# Altium PCB USB-UART V0.1.PcbDoc
Units mm, origin at the board's own origin, x right, y up, seen from the top; angles counter-clockwise.
Board outline 75.95 x 49.4 mm, 2 copper layers (Top Layer, Bottom Layer), stack 1.58 mm thick; 41 components, 24 nets, 129 pads, 346 vias.
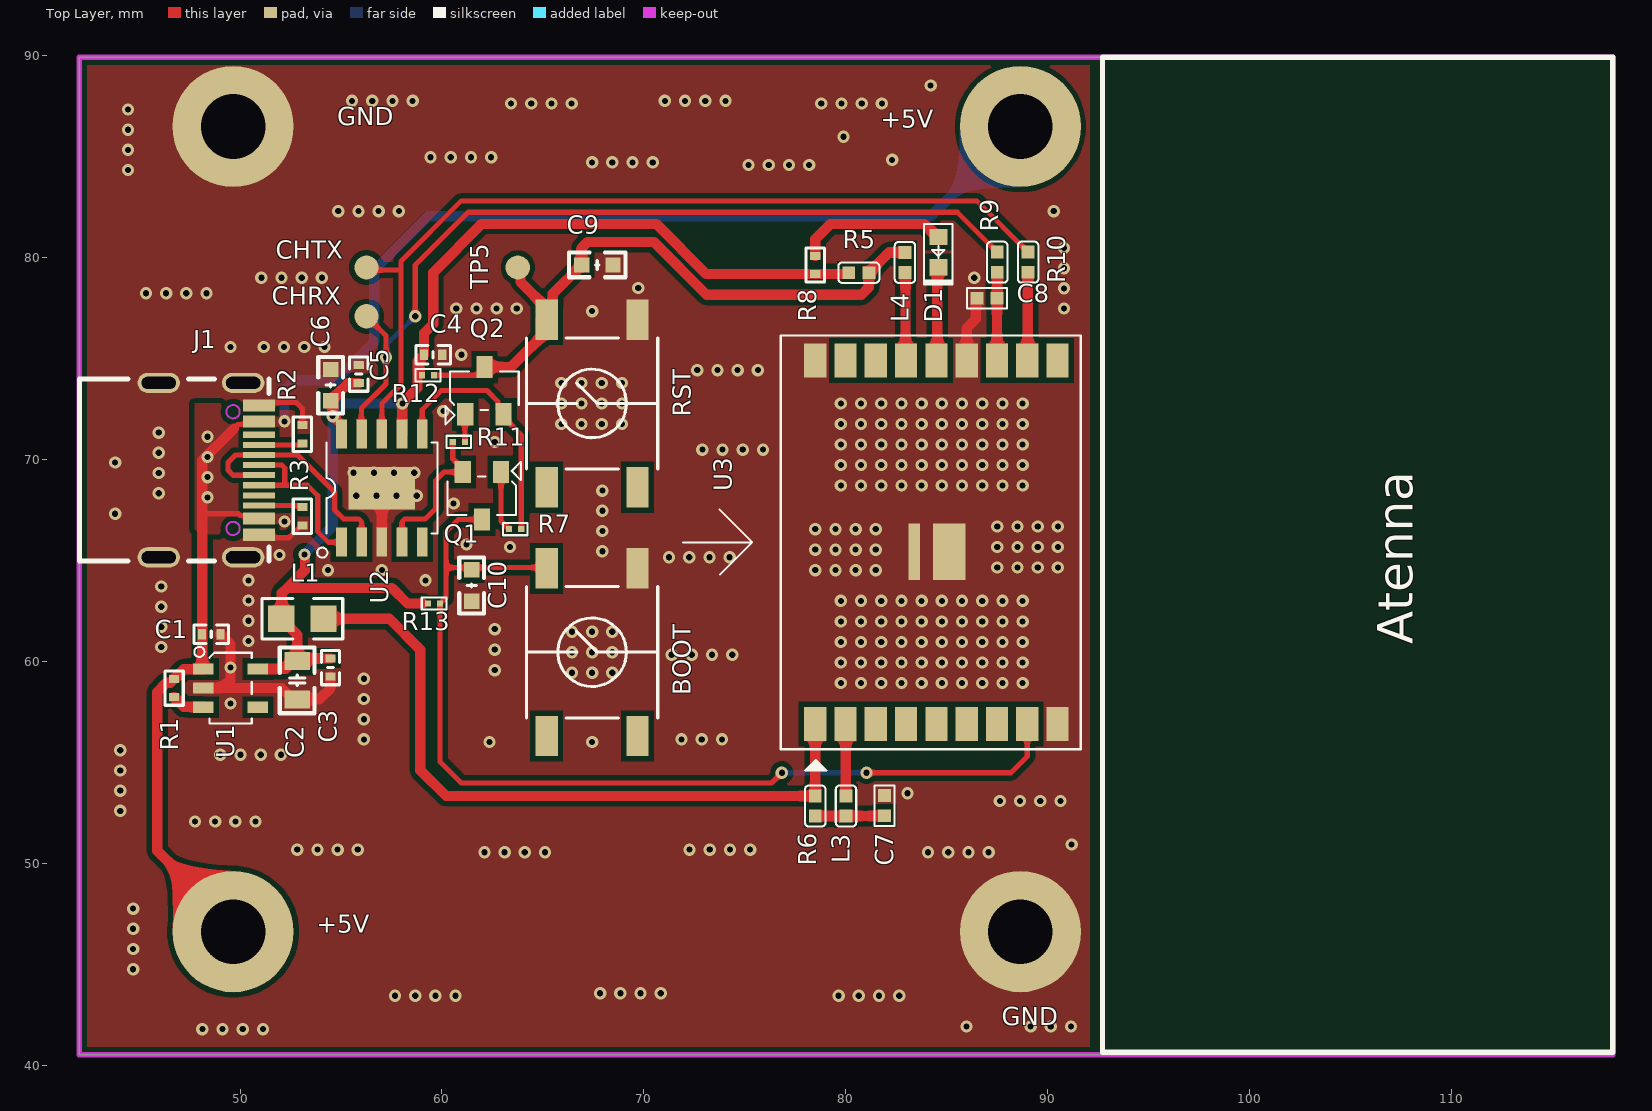
[diagram p0: Top Layer view]
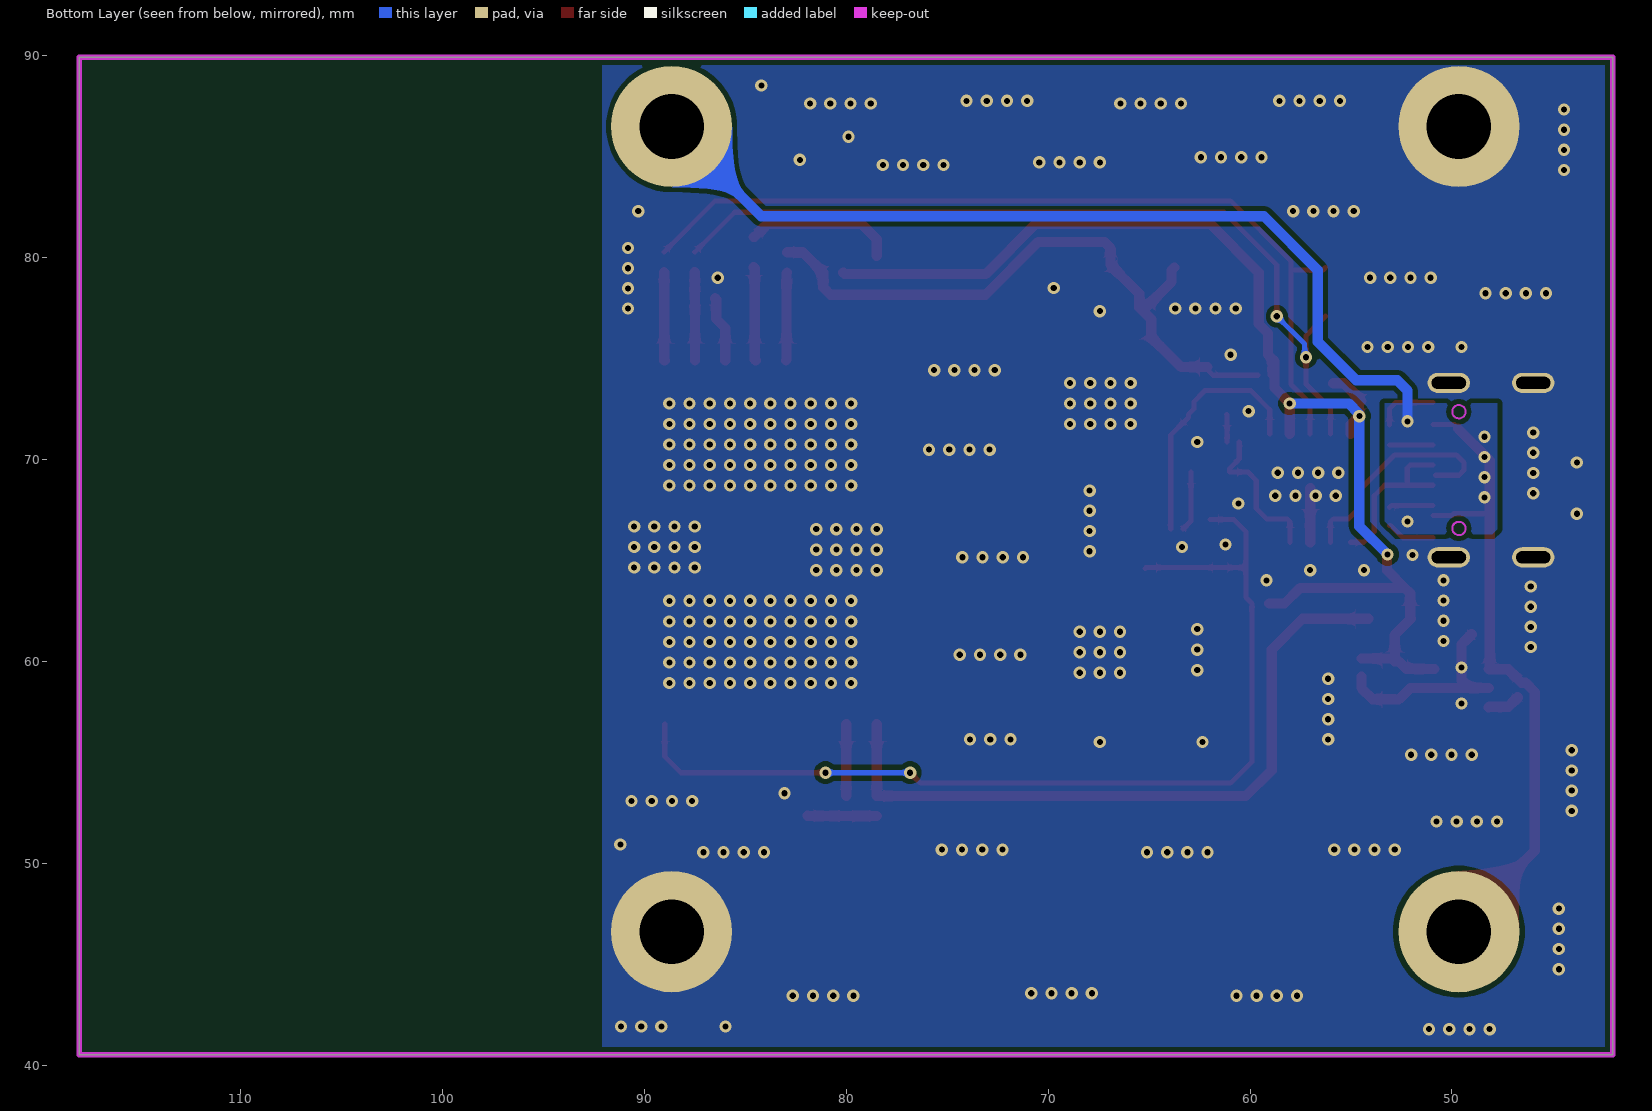
[diagram p1: Bottom Layer view, seen from below]

## Layer stack, top to bottom
Top Solder: solder mask 0.0102, Solder Resist, Dk 3.5
Top Layer: signal copper 0.0356
Dielectric 1: dielectric 1.5086, FR-4, Dk 4.8
Bottom Layer: signal copper 0.0356
Bottom Solder: solder mask 0.0102, Solder Resist, Dk 3.5

## Board outline
42.037,40.513 42.037,89.916 117.983,89.916 117.983,40.513

## Design rules (kind name [scope] priority, off if disabled: settings)
Clearance [All] p1: gap=0.254 ignorepadtopadclearanceinfootprint=FALSE except(0: Arc-Hole Track-Hole SMDPad-Hole THPad-Hole Via-Hole Fill-Hole Poly-Hole Region-Hole Text-Hole; 0.2: Arc-Arc Arc-Track Arc-SMDPad Track-Track Track-SMDPad SMDPad-SMDPad)
PolygonConnect [All] p1: connectstyle=Direct reliefconductorwidth=0.254 reliefentries=4 polygonreliefangle="90 Angle" airgapwidth=0.254
RoutingVias [All] p1: holewidth=0.711 width=1.27 viastyle="Through Hole" minholewidth=0.254 minwidth=0.254 maxholewidth=1.27 maxwidth=1.27
SolderMaskExpansion [All] p1: expansion=0.102 istentingtop=FALSE
Width [All] p1: maxlimit=0.762 minlimit=0.254 preferedwidth=0.254
30 further rules are at their usual default settings.

## Components (designator, comment, footprint, x,y, rotation, side; value= is the part's Value field where it differs from the comment)
+5V "TEST" "srew hole" 49.657,46.609 r0 top value=DNP (schematic designator TP2)
+5V "TEST" "srew hole" 88.646,86.487 r0 top value=DNP (schematic designator TP1)
BOOT "SWITCH" SW-SD-SH-66T04 67.437,60.452 r270 top locked value=SD-SH-66T04-7.0-B (schematic designator BOOT1)
C1 "CAP" "C 0402_L" 48.572,61.341 r180 top value=100nF/50V/X7R/0402
C2 "Cap" "C 0805_L" 52.832,59.055 r270 top value=1uF/10V/X7R/0805
C3 "CAP" "C 0402_L" 54.483,59.69 r270 top value=100nF/50V/X7R/0402
C4 "CAP" "C 0402_L" 59.563,75.184 r180 top value=100nF/50V/X7R/0402
C5 "CAP" "C 0402_L" 55.88,74.226 r270 top value=100nF/50V/X7R/0402
C6 "Cap" "C 0603_L" 54.483,73.675 r270 top value=1uF/50V/X5R/0603
C7 "CAP" CAP-CC0402 81.915,52.848 r270 top value=100nF/50V/X7R/0402
C8 "CAP" CAP-CC0402 86.995,77.978 r180 top value=22pF/50V/NP0/0402
C9 "Cap" "C 0603_L" 67.691,79.629 r180 top value=1uF/50V/X5R/0603
C10 "Cap" "C 0603_L" 61.468,63.754 r90 top value=1uF/50V/X5R/0603
CHRX "TEST" TP-60 56.261,77.089 r90 top value=DNP
CHTX "TEST" TP-60 56.261,79.502 r90 top value=DNP
D1 "LED" LED-0603 84.582,80.264 r270 top value="MS-PTV1608SGBC GREEN 25mA 5V 10uA 62mW -40-85℃"
GND "TEST" "srew hole" 49.657,86.487 r0 top value=DNP (schematic designator TP4)
GND "TEST" "srew hole" 88.646,46.609 r0 top value=DNP (schematic designator TP3)
J1 "USB TYPE-C" TYPE-C-W 50.939,69.471 r270 top locked
L1 "BEAD" FBM-LC0805 53.086,62.103 r0 top value=UPZ2012E121-4R0TF
L3 "RES" RES-RC0402 80.01,52.832 r90 top value=FBMA-6H-100505-500T01
L4 "RES" RES-RC0402 82.931,79.756 r90 top value=FBMA-6H-100505-500T01
Q1 "TRANS_NPN" TRI-SOT-23 61.976,68.199 r180 top value="S9013 H级"
Q2 "TRANS_NPN" TRI-SOT-23 62.103,73.406 r0 top value="S9013 H级"
R1 "RES" "R 0402_L" 46.736,58.674 r270 top value=5.1K/1%/0402
R2 "RES" "R 0402_L" 53.086,71.247 r90 top value=5.1K/1%/0402
R3 "RES" "R 0402_L" 53.086,67.183 r90 top value=5.1K/1%/0402
R5 "RES" RES-RC0402 80.645,79.248 r0 top value=10K/1%/0402
R6 "RES" RES-RC0402 78.486,52.832 r90 top value=10K/1%/0402
R7 "RES" "R 0201_M" 63.627,66.548 r180 top value=4.7K/1%/0201
R8 "RES" "R 0402_L" 78.486,79.629 r90 top value=510R/1%/0402
R9 "RES" RES-RC0402 87.503,79.766 r90 top value=33R/1%/0402
R10 "RES" RES-RC0402 89.027,79.766 r90 top value=33R/1%/0402
R11 "RES" "R 0201_M" 60.833,70.866 r0 top value=4.7K/1%/0201
R12 "RES" "R 0201_M" 59.309,74.168 r180 top value=4.7K/1%/0201
R13 "RES" "R 0201_M" 59.609,62.865 r180 top value=4.7K/1%/0201
RST "SWITCH" SW-SD-SH-66T04 67.437,72.771 r270 top locked value=SD-SH-66T04-7.0-B (schematic designator RST1)
TP5 "TEST" TP-60 63.754,79.502 r0 top value=DNP
U1 "IC_LDO" IC-SOT23-5L-UP8806MMA5-33 49.53,58.674 r270 top value=TPL740F33-5TR
U2 "CH340K" CH340E/K 57.023,68.58 r90 top value=CH340E
U3 "WIFI" WIFI-ESP8684-WROOM-02UC 90.486,56.896 r90 top value=ESP8684-WROOM-02UC

## Footprints (in the part's own frame and the unit in brackets; to place one, negate y for a bottom-side part, rotate by r counter-clockwise, add the part's x,y. Pads: shape width x height; smd on the part's side, far side on the other; paste and mask are expansions set on the pad)
"C 0402_L" [mm] "无极性贴片电容"
  rect 0.4x0.5 smd: 1(-0.45,0) 2(0.45,0)
  silkscreen extent -0.85,-0.45 0.85,0.45, body extent -0.5,-0.26 0.5,0.26, height 0.53
"C 0603_L" [mil] "无极性贴片电容"
  rect 30x30 smd: 1(-30.59,0) 2(30.59,0)
  silkscreen extent -55,-24 55,24, body extent -31,-16 31,16, height 32
"C 0805_L" [mil] "无极性贴片电容"
  rect 35x50 smd: 1(-37.4,0) 2(37.4,0)
  silkscreen extent -64,-34 64,34, body extent -39,-24 39,24, height 20
CAP-CC0402 [mm]
  rrect0% 0.635x0.635 smd: 1(-0.5,0) 2(0.5,0)
  silkscreen extent -1,-0.5 1,0.5, body extent -0.5,-0.25 0.5,0.25, height 0.5
CH340E/K [mm]
  rect 2.1x3.3 smd: 0(0,0)
  rect 1.435x0.53 smd: 1(-2.682,2) 2(-2.682,1) 3(-2.682,0.001) 4(-2.682,-1) 5(-2.682,-2) 6(2.682,-2) 7(2.682,-1) 8(2.682,0.001) 9(2.682,1) 10(2.682,2)
  silkscreen extent -3.45,-2.75 2.25,3.2
FBM-LC0805 [mm]
  rrect0% 1.3x1.3 smd: 1(-1.048,0) 2(1.048,0)
  silkscreen extent -2,-1 2,1
IC-SOT23-5L-UP8806MMA5-33 [mm]
  rect 0.55x1 smd: 1(-0.95,-1.35) 2(0,-1.35) 3(0.95,-1.35) 4(0.95,1.35) 5(-0.95,1.35)
  silkscreen extent -2.04,-1.8 1.75,1.05
LED-0603 [mil]
  rect 32x35 smd: 1(-29.53,0) 2(29.53,0)
  silkscreen extent -55,-28 63,28
"R 0201_M" [mm] "1/20W贴片电阻"
  rect 0.3x0.3 smd: 1(-0.3,0) 2(0.3,0)
  silkscreen extent -0.61,-0.3 0.61,0.3, body extent -0.3,-0.15 0.3,0.15, height 0.23
"R 0402_L" [mm] "1/16W贴片电阻"
  rect 0.4x0.5 smd: 1(-0.45,0) 2(0.45,0)
  silkscreen extent -0.85,-0.45 0.85,0.45, body extent -0.5,-0.25 0.5,0.25, height 0.3
RES-RC0402 [mm]
  rrect0% 0.635x0.635 smd: 1(-0.498,0) 2(0.498,0)
  silkscreen extent -1.02,-0.51 1.02,0.51, body extent -0.5,-0.23 0.5,0.25, height 0.5
"srew hole" [mm]
  round 6 hole 3.2: 1(0,0)
SW-SD-SH-66T04 [mm]
  rect 2x1.1 smd: 1(-4.15,2.25) 2(-4.15,-2.25) 3(4.15,2.25) 4(4.15,-2.25)
  silkscreen extent -3.25,-3.25 3.25,3.25
TP-60 [mm]
  round 1.2 smd: 1(0,0)
TRI-SOT-23 [mm]
  rect 0.8x1.1 smd: 1(-0.95,-1.175) 2(0.95,-1.175) 3(0,1.175)
  silkscreen extent -1.93,-1.68 1.7,0.95
TYPE-C-W [mm]
  oval 1x2.1 hole 0.6 slot 1.7 at 90 deg: 1(-4.32,-0.785) 2(-4.32,-4.965) 3(4.32,-0.785) 4(4.32,-4.965)
  rect 0.3x1.57 smd: A1(-3.35,0) A4(-2.55,0) A5(-1.25,0) A6(-0.25,0) A7(0.25,0) A8(1.25,0) A9(2.55,0) A12(3.35,0) B1(3.05,0) B4(2.25,0) B5(1.75,0) B6(0.75,0) B7(-0.75,0) B8(-1.75,0) B9(-2.25,0) B12(-3.05,0)
  Keep-Out Layer circle w0.1: c-2.89,-1.285 r0.33
  Keep-Out Layer circle w0.1: c2.89,-1.285 r0.33
  silkscreen extent -4.5,-8.9 4.5,0.5
WIFI-ESP8684-WROOM-02UC [mm]
  rect 1.7x1.1 smd: 1(0,12) 2(0,10.5) 3(0,9) 4(0,7.5) 5(0,6) 6(0,4.5) 7(0,3) 8(0,1.5) 9(0,0) 10(18,0) 11(18,1.5) 12(18,3) 13(18,4.5) 14(18,6) 15(18,7.5) 16(18,9) 17(18,10.5) 18(18,12)
  rect 2.8x0.55 smd: 19(8.53,7.095)
  rect 2.8x1.6 smd: 20(8.53,5.37)
  silkscreen extent -2.3,-1.15 19.24,18.55

## Part data
+5V +5V CHRX CHTX GND GND TP5 U1: library part Component_1
  +5V +5V CHRX CHTX GND GND TP5: Vendor=NA
  U1: ID=4A0-0500-2800, Vendor=3PEAK
BOOT RST: library part SW-PB, ID=4A6-0300-0400, Vendor=金成功/键富, 状态=已确认正确
D1: library part LED1, "Typical Green LED", ID=4A2-0300-0700, Vendor=MASON
L1: library part Inductor, ID=4A5-0200-1000, Vendor=Sunlord
L3 L4 R1 R2 R3 R5 R6 R7 R8 R9 R10 R11 R12 R13: library part Res2
  L3 L4: ID=4A5-0200-4000
  R1 R2 R3 R7 R11 R12 R13: ID=4A3-0104-5300, Vendor=YAGEO/WALSIN/SAMSUNG/FH/厚生/旺诠/MURATA
  R5 R6: ID=4A3-0104-0800, Vendor=YAGEO/WALSIN/SAMSUNG/FH/厚生/旺诠/MURATA
  R8: ID=4A3-0104-5500, Vendor=YAGEO/WALSIN/SAMSUNG/FH/厚生/旺诠/MURATA
  R9 R10: ID=4A3-0104-4500, Vendor=YAGEO/WALSIN/SAMSUNG/FH/厚生/旺诠/MURATA
Q1 Q2: library part NPN, "TRI NPN S9013 H级（200-350） 500mA 40V -55-150℃ SOT-23", ID=4A2-0800-0500, Vendor=长电
U3: "WIFI ESP-WROOM-02", Vendor=乐鑫
C1 C3 C4 C5 C7: ID=4A4-0204-0200, Vendor=YAGEO/WALSIN/TDK/SAMSUNG/MURATA/FH
C2: ID=4A4-0200-0200, Vendor=YAGEO/WALSIN/TDK/SAMSUNG/MURATA/FH
C6 C9 C10: ID=4A4-0206-1000, Vendor=YAGEO/WALSIN/TDK/SAMSUNG/MURATA/FH
C8: ID=4A4-0204-1400, Vendor=YAGEO/WALSIN/TDK/SAMSUNG/MURATA/FH

## Via types
v1: diameter 0.61, hole 0.305, Top Layer to Bottom Layer, tented both sides, 346 vias

## Nets (pads, with @x,y where several pads share a name; then routed paths per layer and width w, separated by ;. In a path a pad name is that pad's centre, name@x,y a point inside that pad or via, vN(x,y) a via of type N, cw(c..) or ccw(c..) an arc to the next point about the centre after c; other vN are vias at no path point)
+3.3V: C2.1 C3.1 C4.2 C5.2 C6.2 L1.1 R5.1 R8.1 R12.2 R13.2 U1.5 U2.7 U2.10 | length 64
  Top Layer w0.254: R12.2 59.009,74.699 59.04,74.73 59.04,75.111 C4.2
  Top Layer w0.508: U1.5 52.26,59.624 52.641,60.005 C2.1 ; v1@53.213,65.278 53.213,64.516 52.324,63.627 ; C3.1 52.967,60.14 C2.1 ; U2.10 55.023,71.715 54.61,72.128 54.61,72.771 C6.2 55.361,73.776 C5.2 ; U2.7 58.031,71.271 58.031,72.763 v1(58.039,72.771) 58.039,72.788 58.785,73.534 58.785,74.856 C4.2@59.04,75.111 ; 59.055,62.865 58.293,62.865 57.531,63.627 52.324,63.627 ; C4.2 59.113,76.258 59.563,76.708 59.563,79.248 61.976,81.661 70.612,81.661 73.094,79.179 R8.1 79.803,79.179 79.808,79.184 80.084,79.184 R5.1 ; 52.324,63.627 52.07,63.373 52.07,62.135 L1.1 52.832,61.309 C2.1
  Bottom Layer w0.508: v1(53.19,65.294) 54.587,66.691 v1(54.587,72.144) 54.606,72.164 54.606,72.26 55.117,72.771 v1(58.039,72.771)
+5V: +5V.1 C1.2 J1.A4 J1.A9 J1.B4 J1.B9 R1.1 U1.1 | length 78.4
  Top Layer w0.254: 48.133,67.31 49.911,67.31 50,67.221 J1.B4 ; 49.692,71.536 49.877,71.721 J1.B9
  Top Layer w0.508: +5V.1@49.657,46.609 49.657,46.863 45.898,50.622 45.898,58.478 46.352,58.932 46.544,58.932 R1.1 47.215,59.603 48.159,59.603 U1.1 48.143,59.624 48.122,59.645 C1.2 48.122,69.949 49.7,71.527
  Bottom Layer w0.508: v1(52.197,71.882) 52.197,73.406 52.705,73.914 54.737,73.914 56.642,75.819 56.642,79.375 59.309,82.042 84.201,82.042 +5V.1@88.646,86.487
  other v1: 52.197,66.929 48.387,68.12 48.387,69.12 48.387,70.12 48.387,71.12
CH_RX: CHRX.1 R9.2 U2.9 | length 42.8
  Top Layer w0.254: U2.9 56.007,71.278 56.007,72.517 57.226,73.736 v1(57.226,75.057) v1@57.277,75.057 ; CHRX.1 57.226,76.124 57.226,75.108 v1@57.277,75.057 ; v1@57.277,75.006 v1@57.277,75.057 ; v1(58.674,77.089) 58.674,79.629 61.287,82.242 85.525,82.242 R9.2
  Bottom Layer w0.254: v1(57.226,75.057) 57.294,75.125 57.294,75.709 v1(58.674,77.089)
CH_TX: CHTX.1 R10.2 U2.8 | length 44.1
  Top Layer w0.254: CHTX.1 56.388,79.375 57.912,79.375 57.966,79.321 ; U2.8 57.022,72.77 57.966,73.714 57.966,79.321 ; R10.2 86.487,82.804 60.96,82.804 57.966,79.81 57.966,79.321
CHIP_PU: C9.2 L4.2 Q2.3 R5.2 R12.1 RST.2 TP5.1 | length 32.6
  Top Layer w0.254: R12.1 61.83,74.168 Q2.3@62.103,74.441
  Top Layer w0.508: Q2.3 63.424,74.581 64.891,76.048 64.891,76.948 RST.2@65.314,77.371 ; TP5.1 63.886,79.37 63.886,78.799 RST.2@65.314,77.371 ; L4.2 82.148,80.254 R5.2 81.143,78.519 80.78,78.157 73.1,78.157 70.485,80.772 67.212,80.772 66.914,80.474 C9.2 65.483,78.198 65.483,77.54 RST.2@65.314,77.371
DTR: Q1.2 R11.1 U2.4 | length 7.5
  Top Layer w0.254: U2.4 58.023,66.907 58.172,67.056 59.182,67.056 59.69,67.564 59.69,68.961 60.103,69.374 Q1.2 61.026,69.524 60.533,70.017 R11.1
GND: BOOT.1 C1.1 C2.2 C3.2 C4.1 C5.1 C6.1 C7.1 C8.2 C9.1 C10.1 GND.1 J1.1 J1.2 J1.3 J1.4 J1.A1 J1.A12 J1.B1 J1.B12 R2.2 R3.1 RST.1 U1.2 U2.0 U2.3 U3.9 U3.13 U3.18 U3.19 U3.20 | length 21.8
  Top Layer w0.254: J1.A12 52.424,66.121 53.036,66.733 R3.1 ; J1.A1 52.782,72.821 53.086,72.517 R2.2
  Top Layer w0.508: U1.2 49.149,58.674 ; C1.1 49.53,60.833 49.53,59.055 49.149,58.674 ; C3.2 54.483,58.674 53.931,58.122 52.849,58.122 C2.2 52.641,58.105 52.072,58.674 49.149,58.674 ; U2.3 U2.0 ; U3.13 85.986,76.508 86.432,76.954 86.432,77.915 C8.2
  other v1: 48.133,41.783 49.133,41.783 50.133,41.783 51.133,41.783 85.979,41.91 89.154,41.91 90.154,41.91 91.154,41.91 57.674,43.434 58.674,43.434 59.674,43.434 60.674,43.434 79.645,43.434 80.645,43.434 81.645,43.434 82.645,43.434 67.834,43.561 68.834,43.561 69.834,43.561 70.834,43.561 44.704,44.752 44.704,45.752 44.704,46.752 44.704,47.752 62.103,50.546 63.103,50.546 64.103,50.546 65.103,50.546 84.074,50.546 85.074,50.546 86.074,50.546 87.074,50.546 52.832,50.673 53.832,50.673 54.832,50.673 55.832,50.673 72.263,50.673 73.263,50.673 74.263,50.673 75.263,50.673 91.186,50.927 47.768,52.07 48.768,52.07 49.768,52.07 50.768,52.07 44.069,52.594 87.63,53.086 88.63,53.086 89.63,53.086 90.63,53.086 83.058,53.467 44.069,53.594 44.069,54.594 49.022,55.372 50.022,55.372 51.022,55.372 52.022,55.372 44.069,55.594 62.357,56.007 67.437,56.007 56.134,56.134 71.866,56.134 72.866,56.134 73.866,56.134 56.134,57.134 49.53,57.912 56.134,58.134 79.756,58.928 80.756,58.928 81.756,58.928 82.756,58.928 83.756,58.928 84.756,58.928 85.756,58.928 86.756,58.928 87.756,58.928 88.756,58.928 56.134,59.134 66.437,59.436 67.437,59.436 68.437,59.436 62.611,59.563 49.53,59.69 79.756,59.944 80.756,59.944 81.756,59.944 82.756,59.944 83.756,59.944 84.756,59.944 85.756,59.944 86.756,59.944 87.756,59.944 88.756,59.944 71.374,60.325 72.374,60.325 73.374,60.325 74.374,60.325 66.437,60.452 67.437,60.452 68.437,60.452 62.611,60.579 46.101,60.706 79.756,60.96 80.756,60.96 81.756,60.96 82.756,60.96 83.756,60.96 84.756,60.96 85.756,60.96 86.756,60.96 87.756,60.96 88.756,60.96 50.419,61.008 66.437,61.468 67.437,61.468 68.437,61.468 62.611,61.595 46.101,61.706 79.756,61.976 80.756,61.976 81.756,61.976 82.756,61.976 83.756,61.976 84.756,61.976 85.756,61.976 86.756,61.976 87.756,61.976 88.756,61.976 50.419,62.008 46.101,62.706 79.756,62.992 80.756,62.992 81.756,62.992 82.756,62.992 83.756,62.992 84.756,62.992 85.756,62.992 86.756,62.992 87.756,62.992 88.756,62.992 50.419,63.008 46.101,63.706 50.419,64.008 59.182,64.008 54.356,64.516 57.023,64.516 78.486,64.516 79.486,64.516 80.486,64.516 81.486,64.516 87.503,64.643 88.503,64.643 89.503,64.643 90.503,64.643 71.247,65.151 72.247,65.151 73.247,65.151 74.247,65.151 51.955,65.265 67.945,65.453 78.486,65.532 79.486,65.532 80.486,65.532 81.486,65.532 63.373,65.659 87.503,65.659 88.503,65.659 89.503,65.659 90.503,65.659 61.214,65.786 67.945,66.453 78.486,66.548 79.486,66.548 80.486,66.548 81.486,66.548 87.503,66.675 88.503,66.675 89.503,66.675 90.503,66.675 43.815,67.31 67.945,67.453 60.579,67.818 55.753,68.199 56.753,68.199 57.753,68.199 58.753,68.199 45.974,68.326 67.945,68.453 79.756,68.707 80.756,68.707 81.756,68.707 82.756,68.707 83.756,68.707 84.756,68.707 85.756,68.707 86.756,68.707 87.756,68.707 88.756,68.707 45.974,69.326 55.626,69.342 56.626,69.342 57.626,69.342 58.626,69.342 79.756,69.723 80.756,69.723 81.756,69.723 82.756,69.723 83.756,69.723 84.756,69.723 85.756,69.723 86.756,69.723 87.756,69.723 88.756,69.723 43.815,69.85 45.974,70.326 72.898,70.485 73.898,70.485 74.898,70.485 75.898,70.485 79.756,70.739 80.756,70.739 81.756,70.739 82.756,70.739 83.756,70.739 84.756,70.739 85.756,70.739 86.756,70.739 87.756,70.739 88.756,70.739 62.611,70.866 45.974,71.326 65.913,71.755 66.913,71.755 67.913,71.755 68.913,71.755 79.756,71.755 80.756,71.755 81.756,71.755 82.756,71.755 83.756,71.755 84.756,71.755 85.756,71.755 86.756,71.755 87.756,71.755 88.756,71.755 60.071,72.39 65.913,72.771 66.913,72.771 67.913,72.771 68.913,72.771 79.756,72.771 80.756,72.771 81.756,72.771 82.756,72.771 83.756,72.771 84.756,72.771 85.756,72.771 86.756,72.771 87.756,72.771 88.756,72.771 65.913,73.787 66.913,73.787 67.913,73.787 68.913,73.787 72.644,74.422 73.644,74.422 74.644,74.422 75.644,74.422 60.96,75.184 49.53,75.565 51.181,75.565 52.181,75.565 53.181,75.565 54.181,75.565 67.437,77.343 60.706,77.47 61.706,77.47 62.706,77.47 63.706,77.47 90.805,77.47 45.339,78.232 46.339,78.232 47.339,78.232 48.339,78.232 90.805,78.47 69.723,78.486 51.054,78.994 52.054,78.994 53.054,78.994 54.054,78.994 86.36,78.994 90.805,79.47 90.805,80.47 54.864,82.296 55.864,82.296 56.864,82.296 57.864,82.296 90.297,82.296 44.45,84.328 75.184,84.582 76.184,84.582 77.184,84.582 78.184,84.582 67.437,84.709 68.437,84.709 69.437,84.709 70.437,84.709 82.296,84.836 59.436,84.963 60.436,84.963 61.436,84.963 62.436,84.963 44.45,85.328 79.883,85.979 44.45,86.328 44.45,87.328 63.421,87.63 64.421,87.63 65.421,87.63 66.421,87.63 78.788,87.63 79.788,87.63 80.788,87.63 81.788,87.63 55.547,87.757 56.547,87.757 57.547,87.757 58.547,87.757 71.041,87.757 72.041,87.757 73.041,87.757 74.041,87.757 84.201,88.519
GPIO0: BOOT.2 C10.2 Q1.3 R13.1 U3.8 | length 50.2
  Top Layer w0.254: Q1.3 60.801,67.024 60.198,66.421 60.198,64.643 ; BOOT.2 65.146,64.643 61.468,64.643 60.198,64.643 ; v1(76.835,54.483) 76.327,53.975 60.96,53.975 59.909,55.026 R13.1 60.198,63.154 60.198,64.643 ; v1(81.026,54.483) 88.183,54.483 88.986,55.286 U3.8
  Bottom Layer w0.254: v1(76.835,54.483) v1(81.026,54.483)
NetC7_2: C7.2 L3.1 R6.1 | length 3.4
  Top Layer w0.508: R6.1 L3.1 80.017,52.341 81.908,52.341 C7.2
NetC8_1: C8.1 R9.1 U3.12 | length 4.4
  Top Layer w0.508: U3.12 87.491,74.901 87.491,77.974 C8.1 87.499,77.982 87.499,79.265 R9.1
NetD1_1: D1.1 R8.2 | length 7.5
  Top Layer w0.508: R8.2 78.486,80.899 79.248,81.661 83.897,81.661 84.544,81.014 D1.1
NetD1_2: D1.2 U3.14 | length 4.7
  Top Layer w0.508: U3.14 84.534,74.944 84.534,79.466 D1.2
NetJ1_A5: J1.A5 R2.1 | length 2.1
  Top Layer w0.254: J1.A5 R2.1@53.086,70.721
NetJ1_B5: J1.B5 R3.2 | length 2.2
  Top Layer w0.254: J1.B5 52.998,67.721 R3.2
NetL1_2: L1.2 R6.2 U3.1 | length 35
  Top Layer w0.508: L1.2 57.404,62.103 58.928,60.579 58.928,54.61 60.208,53.33 R6.2 U3.1
NetL4_1: L4.1 U3.15 | length 4.4
  Top Layer w0.508: L4.1 82.959,79.231 82.959,74.923 U3.15
NetQ1_1: Q1.1 R7.2 | length 3
  Top Layer w0.254: Q1.1 62.926,66.949 R7.2
NetQ2_1: Q2.1 R11.2 | length 1.4
  Top Layer w0.254: R11.2 61.133,72.211 Q2.1
NetR1_2: R1.2 U1.3 | length 1.7
  Top Layer w0.508: R1.2 47.215,57.745 48.159,57.745 U1.3
NetR10_1: R10.1 U3.11 | length 4.4
  Top Layer w0.508: U3.11 89.006,74.916 89.006,79.248 R10.1
RTS: Q2.2 R7.1 U2.6 | length 12.4
  Top Layer w0.254: U2.6 59.023,72.462 59.967,73.406 62.23,73.406 62.78,72.856 62.78,72.504 Q2.2 63.053,72.081 63.927,71.207 R7.1
UD+: J1.A6 J1.B6 U2.1 | length 8.5
  Top Layer w0.254: J1.B6 52.211,68.721 ; J1.A6 52.062,69.721 52.211,69.572 52.211,68.721 ; U2.1 54.372,65.898 53.848,66.421 53.848,68.199 53.326,68.721 52.211,68.721
UD-: J1.A7 J1.B7 U2.2 | length 11.6
  Top Layer w0.254: J1.A7@50.8,69.215 49.657,69.215 49.403,69.469 49.403,69.85 49.774,70.221 J1.B7 52.842,70.221 54.674,68.389 54.674,67.5 55.118,67.056 55.874,67.056 56.023,66.907 U2.2
WIFI-EN: L3.2 U3.2 | length 3.6
  Top Layer w0.508: U3.2 79.998,56.884 79.998,53.342 L3.2
pads on no net: BOOT.3 BOOT.4 J1.A8 J1.B8 RST.3 RST.4 U1.4 U2.5 U3.3 U3.4 U3.5 U3.6 U3.7 U3.10 U3.16 U3.17

## Polygon pours and split planes (outlines as drawn)
GND on Top Layer "NONET_L01_P-001" (solid, remove dead copper, pour order 4): 42.035,40.507 42.035,89.91 102.741,89.91 102.741,40.507
+5V on Top Layer "NONET_L01_P-001" (solid, pour order 2): 47.752,66.548 48.006,66.294 52.705,66.294 53.34,66.929 53.34,72.771 47.752,72.771
GND on Bottom Layer "NONET_L01_P-001" (solid, remove dead copper, pour order 3): 42.037,40.513 42.037,89.916 109.982,89.916 109.982,40.513
+5V on Bottom Layer "NONET_L01_P-001" (solid, pour order 0): 47.752,66.548 48.006,66.294 52.705,66.294 53.34,66.929 53.34,72.771 47.752,72.771

## Keep-outs
Keep-Out Layer:
  the board outline again, w0.254

## Other copper
Top Layer:
  pour cut-out: 92.075,89.916 92.075,40.513 117.983,40.513 117.983,89.916
Bottom Layer:
  pour cut-out: 92.075,89.916 92.075,40.513 117.983,40.513 117.983,89.916

## Silkscreen, mask and mechanical layers (free items; w line width, h text height)
Top Overlay:
  lines w0.254: 92.71,40.64 117.983,40.64 117.983,89.916 92.71,89.916 92.71,40.64
  text "Atenna" at 108.681,60.833 h3 r90